# Altium PCB Iot_board_pcb.PcbDoc (part 1 of 2)
Units mm, origin at the board's own origin, x right, y up, seen from the top; angles counter-clockwise.
Board outline 52.22 x 32.36 mm, 2 copper layers (Top Layer, Bottom Layer); 44 components, 33 nets, 185 pads, 33 vias.
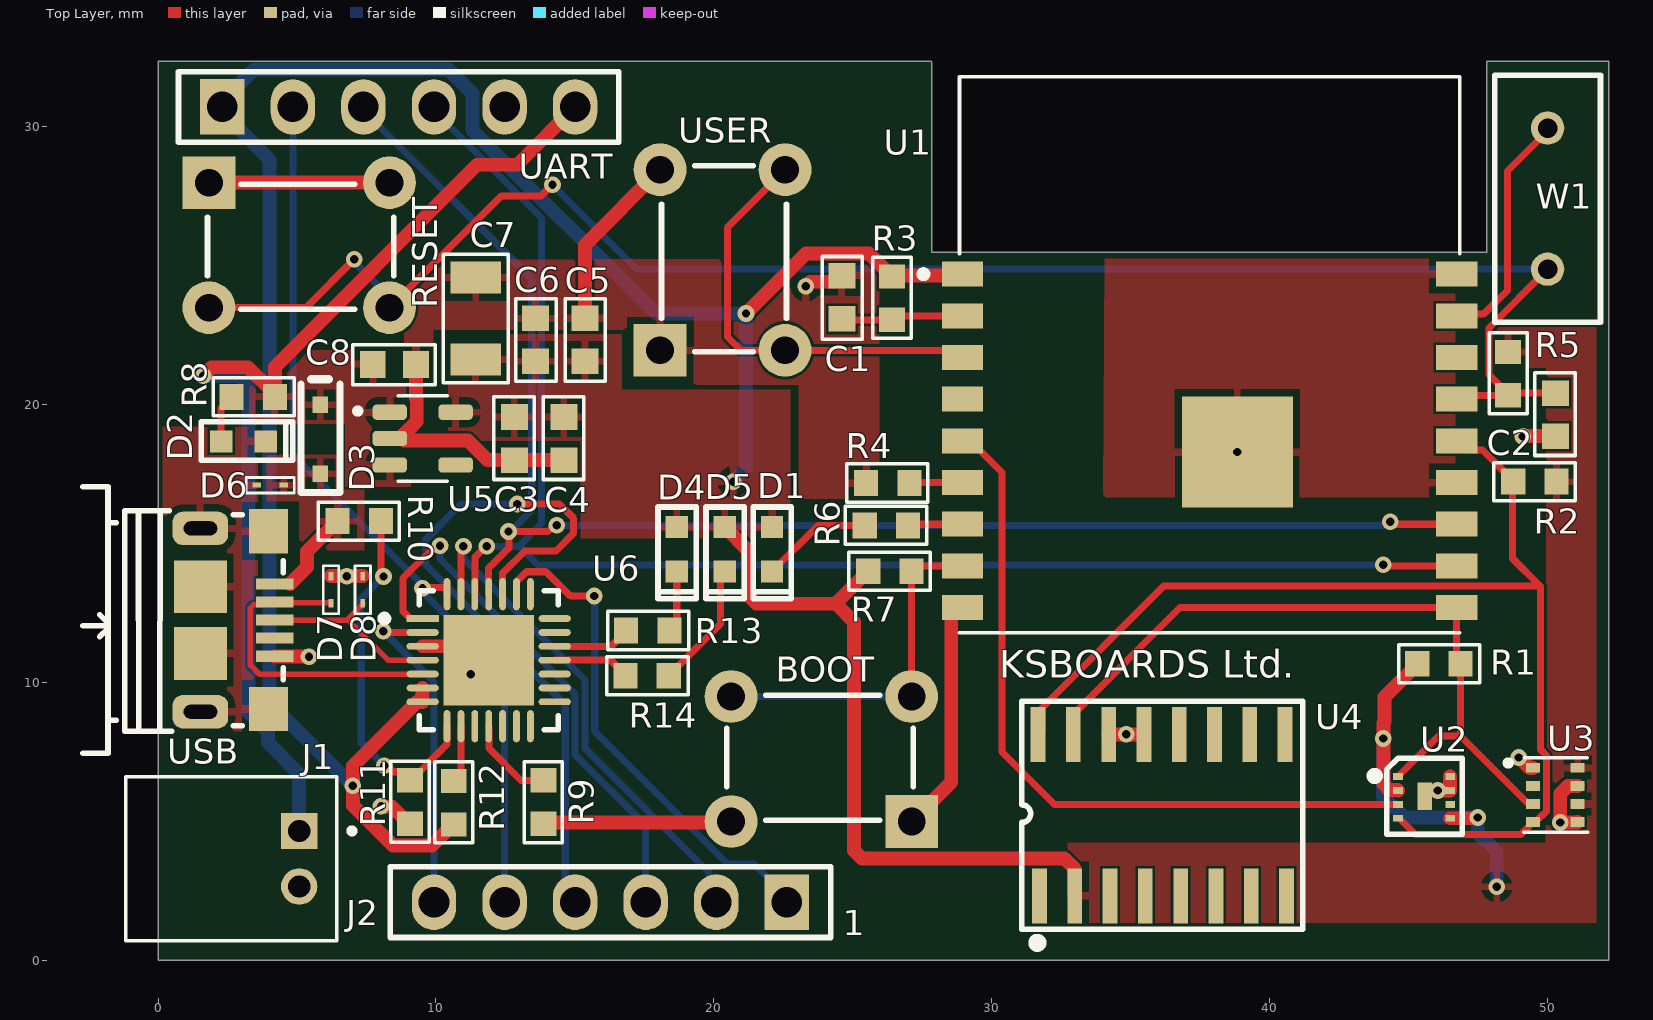
[diagram p0: Top Layer view]
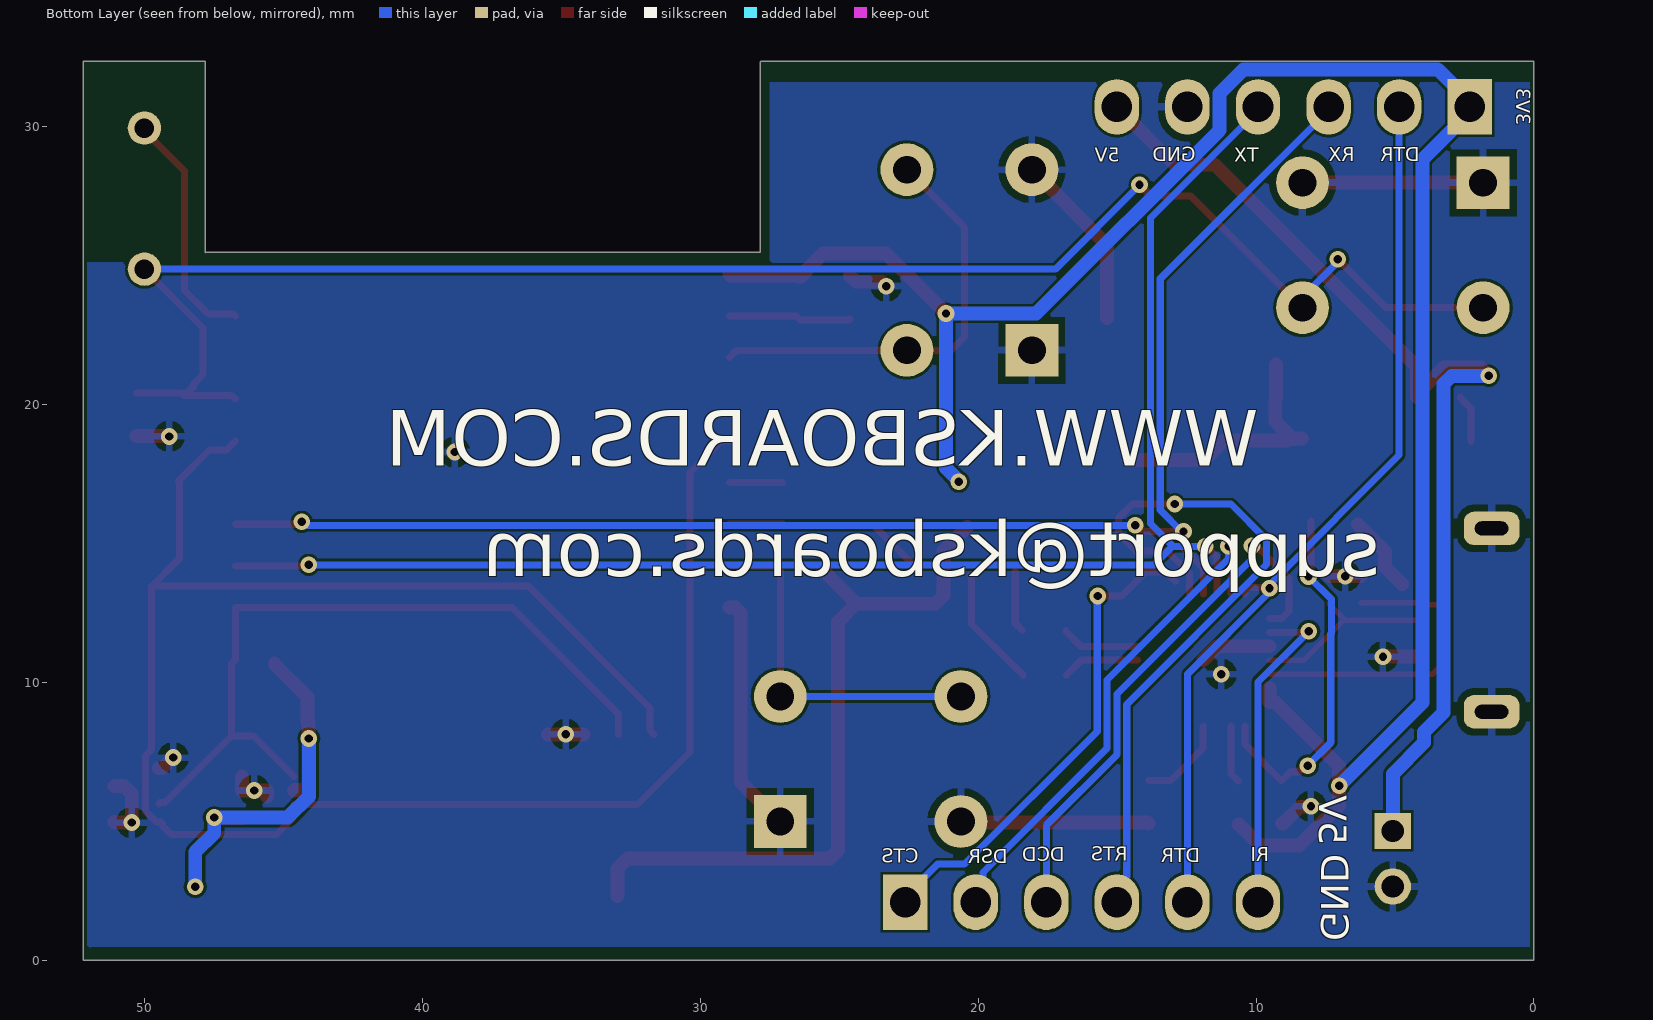
[diagram p1: Bottom Layer view, seen from below]
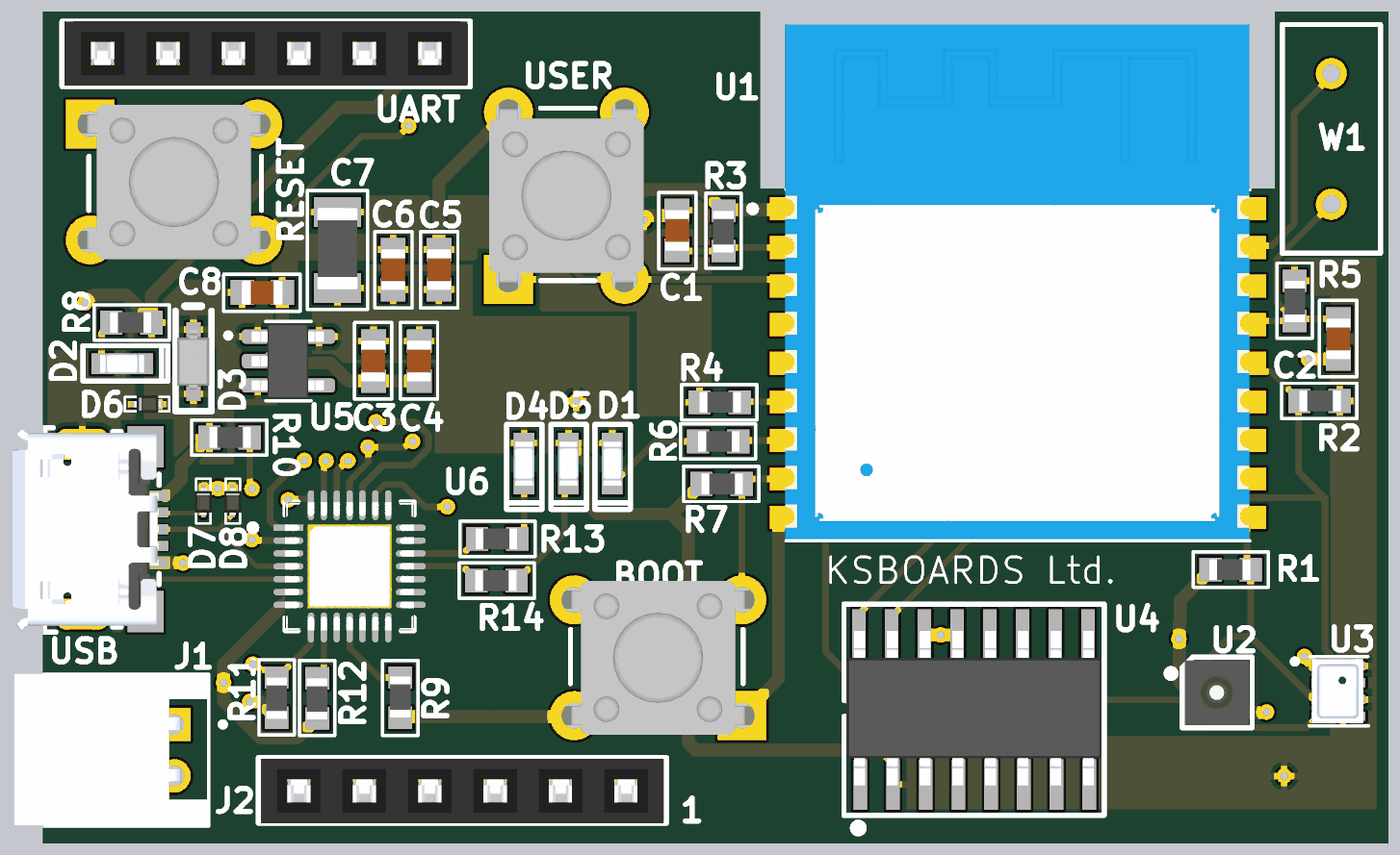
[diagram p2: 3D render of the assembled board from above, using the file's embedded part models]

## Layer stack, top to bottom
Top Solder: solder mask 0.0102, Solder Resist, Dk 3.5
Top Layer: signal copper 0.0356
Dielectric 1: dielectric 0.32, FR-4, Dk 4.8
Bottom Layer: signal copper 0.0356
Bottom Solder: solder mask 0.0102, Solder Resist, Dk 3.5

## Board outline
27.813,32.36 27.838,32.334 27.838,25.476 47.803,25.476 47.828,25.451 47.828,32.36 52.222,32.36 52.222,0 0,0 0,32.36

## Design rules (kind name [scope] priority, off if disabled: settings)
Clearance [All] p1: gap=0.1 ignorepadtopadclearanceinfootprint=FALSE
DiffPairsRouting [All] p1: maxlimit=0.254 minlimit=0.2 mostfreqgap=0.2 toplayer_minwidth=0.2 toplayer_maxwidth=0.2 toplayer_prefwidth=0.2 bottomlayer_minwidth=0.2 bottomlayer_maxwidth=0.2 bottomlayer_prefwidth=0.2 maxuncoupledlength=12.7
MinimumSolderMaskSliver [All] p1: minsoldermaskwidth=0.01
PolygonConnect [All] p1: connectstyle=Relief reliefconductorwidth=0.254 reliefentries=4 polygonreliefangle="90 Angle" airgapwidth=0.254
RoutingVias [All] p1: holewidth=0.711 width=1.27 viastyle="Through Hole" minholewidth=0.711 minwidth=1.27 maxholewidth=0.711 maxwidth=1.27
SilkToSilkClearance [All] p1: silktosilkclearance=0.005
SilkToSolderMaskClearance [IsPad] p1: minsilkscreentomaskgap=0.005 clearancetoexposedcopper=TRUE
SolderMaskExpansion [All] p1: expansion=0.102 istentingtop=FALSE
Width Width_Power [InNetClass('PowerNets')] p1: maxlimit=0.5 minlimit=0.5 preferedwidth=0.5
Width Width_1 [All] p2: maxlimit=0.254 minlimit=0.254 preferedwidth=0.254
26 further rules are at their usual default settings.

## Classes and differential pairs
net class PowerNets: 3V3 5V_ext GND Vbus
differential pair usb: +CON_USB_P -CON_USB_N

## Components (designator, comment, footprint, x,y, rotation, side; value= is the part's Value field where it differs from the comment)
BOOT "1825910-6" 1825910-6 23.876,7.239 r270 top (schematic designator SW1)
C1 "0.1uF" C0603 24.613,23.851 r270 top
C2 "0.1uF" C0603 50.292,19.634 r90 top
C3 "4.7uF" C0603 12.827,18.771 r90 top
C4 "0.1uF" C0603 14.605,18.771 r90 top
C5 "1uF" C0603 15.367,22.327 r270 top
C6 "10uF" C0603 13.589,22.327 r270 top
C7 "100uF" C1206 11.43,23.089 r270 top
C8 "1uF" C0603 8.509,21.438 r180 top
D1 "Blue" LED_0603 22.098,14.783 r90 top
D2 "Blue" LED_0603 3.073,18.669 r180 top
D3 "BAT760-7" SOD323 5.842,18.771 r270 top
D4 "Red" LED_0603 18.669,14.783 r90 top
D5 "GREEN" LED_0603 20.396,14.783 r90 top
D6 "CPDQ5V0-HF" SOD-923F 4.039,17.094 r180 top
D7 "CPDQ5V0-HF" SOD-923F 6.223,13.33 r90 top
D8 "CPDQ5V0-HF" SOD-923F 7.366,13.33 r90 top
J1 "JST 2 pin connector" JST_2PINS 5.08,3.648 r270 top
J2 "UART CONN PINS" HDR_FEMALE_1x6_2.54mm 22.631,2.083 r270 top
R1 "10k" R0603 46.101,10.668 r0 top
R2 "10k" R0603 49.555,17.221 r180 top
R3 "10k" R0603 26.416,23.825 r90 top
R4 "10k" R0603 26.264,17.17 r180 top
R5 "10k" R0603 48.59,21.107 r90 top
R6 "1k" R0603 26.213,15.646 r180 top
R7 "1k" R0603 26.34,13.995 r180 top
R8 "2k" R0603 3.429,20.269 r0 top
R9 "10k" R0603 13.868,5.69 r270 top
R10 "22k" R0603 7.239,15.799 r180 top
R11 "47.5k" R0603 9.068,5.69 r90 top
R12 "2k" R0603 10.643,5.664 r90 top
R13 "330R" R0603 17.628,11.862 r0 top
R14 "330R" R0603 17.602,10.236 r0 top
RESET "1825910-6" 1825910-6 5.08,25.73 r90 top (schematic designator SW3)
U1 "ESP-WROOM-02D (4MB)" MODULE_ESP-WROOM-02 37.846,19.787 r0 top
U2 "SHT30-DIS-B2.5KS" QFN8 44.628,6.604 r0 top
U3 "BMP280" LGA8 50.317,5.944 r0 top
U4 "DS3231SN#" SOP16 36.144,5.218 r90 top
U5 "ADP160AUJZ-3.3-R7" SOT95 9.525,18.771 r0 top
U6 "CP2102N-A01-GQFN28" FP-CP2102N-A01-GQFN28-IPC_A 11.901,10.794 r0 top
UART "UART CONN PINS" HDR_FEMALE_1x6_2.54mm 2.311,30.709 r90 top (schematic designator J3)
USB "USB-CON" 10118193 4.199,13.537 r270 top (schematic designator J4)
USER "1825910-6" 1825910-6 20.32,25.197 r180 top (schematic designator SW2)
W1 "Jumper" RAD-0.2 50.013,27.407 r270 top

## Footprints (in the part's own frame and the unit in brackets; to place one, negate y for a bottom-side part, rotate by r counter-clockwise, add the part's x,y. Pads: shape width x height; smd on the part's side, far side on the other; paste and mask are expansions set on the pad)
1825910-6 [mm]
  rect 1.9x1.9 hole 1: 1(2.25,3.25)
  round 1.9 hole 1: 2(2.25,-3.25) 3(-2.25,3.25) 4(-2.25,-3.25)
  silkscreen extent -2.3,-3.4 2.2,3.3, body extent -3,-3.9 2.99,3.9, height 5.01
10118193 [mm]
  rect 0.4x1.35 smd mask+0.05: 1(0,0) 2(0.65,0) 3(1.3,0) 4(1.95,0) 5(2.6,0)
  rect 1.6x1.4 smd: 6(-1.9,-0.225) 7(4.5,-0.225)
  rrect60% 1.2x2 hole 0.5 slot 1.2 at 90 deg: 8(-2,-2.675) 9(4.6,-2.675)
  rect 1.9x1.9 smd: 10(0.1,-2.675) 11(2.5,-2.675)
  silkscreen extent -3.5,-6.9 6.1,0.31, body extent -2.63,-5.41 5.23,0.3, height 2.86
C0603 [mm]
  rect 0.92x0.97 smd: 1(-0.775,0) 2(0.775,0)
  silkscreen extent -1.47,-0.71 1.5,0.74, body extent -0.8,-0.47 0.8,0.48, height 0.79
C1206 [mm]
  rect 1.16x1.82 smd: 1(-1.475,0) 2(1.475,0)
  silkscreen extent -2.31,-1.17 2.31,1.17, body extent -1.65,-0.8 1.55,0.8, height 0.85
FP-CP2102N-A01-GQFN28-IPC_A [mm]
  rect 1.16x0.242 smd paste+0 mask+0: 1(-2.376,1.5)
  rrect100% 1.16x0.242 smd paste+0 mask+0: 2(-2.376,1) 3(-2.376,0.5) 4(-2.376,0) 5(-2.376,-0.5) 6(-2.376,-1) 7(-2.376,-1.5) 15(2.376,-1.5) 16(2.376,-1) 17(2.376,-0.5) 18(2.376,0) 19(2.376,0.5) 20(2.376,1) 21(2.376,1.5)
  rrect100% 0.242x1.16 smd paste+0 mask+0: 8(-1.5,-2.376) 9(-1,-2.376) 10(-0.5,-2.376) 11(0,-2.376) 12(0.5,-2.376) 13(1,-2.376) 14(1.5,-2.376) 22(1.5,2.376) 23(1,2.376) 24(0.5,2.376) 25(0,2.376) 26(-0.5,2.376) 27(-1,2.376) 28(-1.5,2.376)
  rect 3.25x3.25 smd paste-1000 mask+0: 29(0,0)
  silkscreen extent -3.88,-2.5 2.5,2.5, body extent -3.46,-3.46 3.46,3.46, height 0.25
HDR_FEMALE_1x6_2.54mm [mm]
  rect 2x1.6 hole 1.1: 1(0,0)
  oval 2x1.6 hole 1.1: 2(0,-2.54) 3(0,-5.08) 4(0,-7.62) 5(0,-10.16) 6(0,-12.7)
  silkscreen extent -1.27,-14.27 1.27,1.57, body extent -1.23,-14.17 1.27,1.47, height 8.31
JST_2PINS [mm]
  rect 1.308x1.308 hole 0.8: 1(-1,0)
  round 1.308 hole 0.8: 2(1,0)
  silkscreen extent -2.95,-6.25 2.95,2, body extent -2.98,-6.19 2.92,1.41, height 4.8
LED_0603 [mm]
  rect 0.8x0.8 smd: 1(-0.8,0) 2(0.8,0)
  silkscreen extent -1.78,-0.7 1.53,0.67, body extent -0.85,-0.4 0.85,0.4, height 0.66
LGA8 [mm]
  rect 0.5x0.35 smd: 1(-0.825,0.975) 2(-0.825,0.325) 3(-0.825,-0.325) 4(-0.825,-0.975) 5(0.775,-0.975) 6(0.775,-0.325) 7(0.775,0.325) 8(0.775,0.975)
  silkscreen extent -1.82,-1.35 1.14,1.35, body extent -1.05,-1.26 0.95,1.24, height 1
MODULE_ESP-WROOM-02 [mm]
  rect 1.485x0.9 smd paste-2: 1(-8.892,4.9) 2(-8.892,3.4) 3(-8.892,1.9) 4(-8.892,0.4) 5(-8.892,-1.1) 6(-8.892,-2.6) 7(-8.892,-4.1) 8(-8.892,-5.6) 9(-8.892,-7.1) 10(8.892,-7.1) 11(8.892,-5.6) 12(8.892,-4.1) 13(8.892,-2.6) 14(8.892,-1.1) 15(8.892,0.4) 16(8.892,1.9) 17(8.892,3.4) 18(8.892,4.9)
  rect 4x4 smd paste-3: 19(1,-1.5)
  silkscreen extent -10.35,-8 9,12, body extent -9.03,-7.94 8.97,12.06, height 3.3
QFN8 [mm]
  rect 0.35x0.25 smd: 1(0,0) 2(0,-0.5) 3(0,-1) 4(0,-1.5) 5(1.879,-1.5) 6(1.879,-1) 7(1.879,-0.5) 8(1.879,0)
  rect 0.524x1 smd: 9(0.965,-0.711)
  silkscreen extent -0.87,-2.08 2.31,0.66, body extent -0.31,-1.97 2.19,0.53, height 0.9
R0603 [mm]
  rect 0.87x0.93 smd: 1(-0.78,0) 2(0.78,0)
  silkscreen extent -1.45,-0.69 1.47,0.69, body extent -0.83,-0.4 0.77,0.4, height 0.55
RAD-0.2 [mm] "Radial Cap, Thru-Hole; 2 Leads; 0.2 in Pin Spacing"
  round 1.2 hole 0.7: 1(-2.54,0) 2(2.54,0)
  silkscreen extent -4.44,-1.91 4.44,1.91
SOD323 [mil]
  rect 23x22 smd: 1(-48,0) 2(50,0)
  silkscreen extent -84,-28 77,28, body extent -48,-25 50,24, height 35
SOD-923F [mm]
  rect 0.3x0.175 smd: 1(-0.487,0) 2(0.487,0)
  silkscreen extent -0.86,-0.28 0.86,0.28, body extent -0.55,-0.33 0.5,0.33, height 0.82
SOP16 [mm]
  rect 1.98x0.53 smd: 1(-2.907,4.42) 2(-2.907,3.15) 3(-2.907,1.88) 4(-2.907,0.61) 5(-2.907,-0.66) 6(-2.907,-1.93) 7(-2.907,-3.2) 8(-2.907,-4.47) 9(2.907,-4.42) 10(2.907,-3.15) 11(2.907,-1.88) 12(2.907,-0.61) 13(2.907,0.66) 14(2.907,1.93) 15(2.907,3.2) 16(2.907,4.47)
  silkscreen extent -4.67,-5.05 4.1,5.05, body extent -2.94,-4.95 3.06,4.95, height 1.75
SOT95 [mm]
  rrect50% 1.24x0.55 smd: 1(-1.185,0.95) 2(-1.185,0) 3(-1.185,-0.95) 4(1.185,-0.95) 5(1.185,0.95)
  silkscreen extent -2.44,-1.54 0.88,1.54, body extent -1.42,-1.45 1.38,1.45, height 0.95

## Part data
BOOT RESET USER: "SWITCH TACTILE SPST-NO 0.05A 24V", Contact Current Rating=50mA, Contact Resistance=100mR, Manufacturer="TE Connectivity Alcoswitch", Max Operating Temperature=85°C, Max Voltage Rating (DC)=24V, Min Operating Temperature=-35°C, Operating Force=160gf, Package Quantity=750, Supplier Part Number 1=450-1650-ND, Actuator Length=0.055inch, Actuator Material=PBT, Actuator Type=Standard, Category="Pushbutton Switches", ComponentLink1Description=https://datasheet.ciiva.com/30199/1825910-6rqpn1825910-6-30199520.pdf?src-supplier=Onlinecomponents.com, ComponentLink1URL=https://datasheet.ciiva.com/30199/1825910-6rqpn1825910-6-30199520.pdf?src-supplier=Onlinecomponents.com, ComponentLink2Description=https://datasheet.ciiva.com/15184/getdatasheetpartid-395915-15184509.pdf?src-supplier=Verical, ComponentLink2URL=https://datasheet.ciiva.com/15184/getdatasheetpartid-395915-15184509.pdf?src-supplier=Verical, Contact Material="Copper Alloy", Contact Plating=Silver, Electrical Life=100000Cycles, ELV=Compliant, Illumination Type=Non-Illuminated,Illuminated, Lead Free="Lead Free", Length=5.99mm, Manufacturer Part Number=1825910-6, Max Current Rating=50mA, Mechanical Life=100000Cycles, Mount="Through Hole", Orientation=Straight, Packaging="Loose Piece", Pricing 1="1=0,10000, 10=0,10100, 25=0,09560, 100=0,08700, 250=0,08180, 500=0,07484, 1000=0,06265, 5000=0,05743, 10000=0,05395 (USD)", REACH SVHC=Unknown, RoHS=Yes, Stock 1=151652, Supplier 1=Digi-Key, Switch Function=Off-Mom, Switch Travel=0.25mm, Termination="PC Pins", Throw Configuration=SPST, Type=Switch
C1 C2 C4: library part C0603C104K5RACTU, "KEMET - C0603C104K5RACTU - SMD Multilayer Ceramic Capacitor, 0.1 µF, 50 V, 0603 [1608 Metric], ± 10%, X7R, C Series KEMET", Capacitance=100nF, Case Code (Imperial)=0603, Case Code (Metric)=1608, Dielectric=X7R, Dielectric Material=Ceramic, Manufacturer=KEMET, Max Operating Temperature=125°C, Min Operating Temperature=-55°C, Package Quantity=1, Supplier Part Number 1=399-5089-1-ND, Tolerance=10%, Voltage=50V, Case/Package=0603, Category="Ceramic Capacitors", Contact Plating=Tin,Matte, Depth=0.8mm, Dissipation Factor=2.5%, Height=0.8mm, Lead Pitch=0.7mm, Length=0.063inch, Manufacturer Part Number=C0603C104K5RACTU, Mount="Surface Mount", Number of Pins=2, Packaging="Tape and Reel", Pricing 1="1=0,12000, 10=0,08500, 50=0,04620, 100=0,03770, 500=0,02696, 1000=0,02118 (USD)", Radiation Hardening=No, REACH SVHC="No SVHC", RoHS=Yes, RoHS Compliant=Yes, Series="SMD Comm X7R", Stock 1=4652879, Supplier 1=Digi-Key, Termination=SMD/SMT, Thickness=0.034inch, Voltage Rating=50V, Voltage Rating (DC)=50V, Width=0.031inch
C3: library part C0603C475K9PACTU, "KEMET - C0603C475K9PACTU - SMD Multilayer Ceramic Capacitor, 4.7 µF, 6.3 V, 0603 [1608 Metric], ± 10%, X5R, C Series KEMET", Case Code (Imperial)=0603, Case Code (Metric)=1608, Dielectric=X5R, Dielectric Material=Ceramic, Manufacturer=KEMET, Max Operating Temperature=85°C, Min Operating Temperature=-55°C, Package Quantity=1, Supplier Part Number 1=399-3482-1-ND, Tolerance=10%, Voltage=6.3V, Capacitance=4.7uF, Case/Package=0603, Category="Ceramic Capacitors", ComponentLink1Description=https://datasheet.ciiva.com/145/docfinderpartnumber-c0603c475k9pactu-145072.pdf?src-supplier=Digi-Key, ComponentLink1URL=https://datasheet.ciiva.com/145/docfinderpartnumber-c0603c475k9pactu-145072.pdf?src-supplier=Digi-Key, ComponentLink2Description=https://datasheet.ciiva.com/7823/1732700-7823808.pdf?src-supplier=Element14, ComponentLink2URL=https://datasheet.ciiva.com/7823/1732700-7823808.pdf?src-supplier=Element14, ComponentLink3Description=https://datasheet.ciiva.com/28682/1789732-28682301.pdf?src-supplier=Element14, ComponentLink3URL=https://datasheet.ciiva.com/28682/1789732-28682301.pdf?src-supplier=Element14, ComponentLink4Description=https://datasheet.ciiva.com/7824/40889-7824047.pdf?src-supplier=Element14, ComponentLink4URL=https://datasheet.ciiva.com/7824/40889-7824047.pdf?src-supplier=Element14, Construction=Flat, Contact Plating=Tin,Matte, Depth=0.8mm, Dissipation Factor=5%, Height=0.8mm, Lead Free="Lead Free", Lead Pitch=0.7mm, Length=1.6mm, Manufacturer Part Number=C0603C475K9PACTU, Mount="Surface Mount,PCB", Number of Pins=2, Packaging="Tape and Reel", Pricing 1="1=0,16000, 10=0,11500, 50=0,06520, 100=0,05410, 500=0,03792, 1000=0,03139 (USD)", Radiation Hardening=No, REACH SVHC="No SVHC", RoHS=Yes, RoHS Compliant=Yes, Series=C, Stock 1=1092737, Supplier 1=Digi-Key, Termination=SMD/SMT, Thickness=0.035inch, Voltage Rating=6.3V, Voltage Rating (DC)=6.3V, Width=0.031inch
C5 C8: library part C0603C105K8PACTU, "Cap Ceramic 1uF 10V X5R 10% SMD 0603 85°C Paper T/R", Case Code (Imperial)=0603, Case Code (Metric)=1608, Dielectric=X5R, Dielectric Material=Ceramic, Manufacturer=KEMET, Max Operating Temperature=85°C, Min Operating Temperature=-55°C, Package Quantity=1, Supplier Part Number 1=399-3118-1-ND, Tolerance=10%, Voltage=10V, Capacitance=1uF, Case/Package=0603, Category="Ceramic Capacitors", ComponentLink1Description=https://datasheet.ciiva.com/11787/0900766b8116eb59-11787747.pdf?src-supplier=RSComponents, ComponentLink1URL=https://datasheet.ciiva.com/11787/0900766b8116eb59-11787747.pdf?src-supplier=RSComponents, ComponentLink2Description=https://datasheet.ciiva.com/6074/40889-6074647.pdf?src-supplier=Farnell, ComponentLink2URL=https://datasheet.ciiva.com/6074/40889-6074647.pdf?src-supplier=Farnell, ComponentLink3Description=https://datasheet.ciiva.com/28645/1831760-28645655.pdf?src-supplier=Element14, ComponentLink3URL=https://datasheet.ciiva.com/28645/1831760-28645655.pdf?src-supplier=Element14, ComponentLink4Description=https://datasheet.ciiva.com/26847/getdatasheetpartid-385480-26847548.pdf?src-supplier=Verical, ComponentLink4URL=https://datasheet.ciiva.com/26847/getdatasheetpartid-385480-26847548.pdf?src-supplier=Verical, ComponentLink5Description=https://datasheet.ciiva.com/7823/40889-7823998.pdf?src-supplier=Element14, ComponentLink5URL=https://datasheet.ciiva.com/7823/40889-7823998.pdf?src-supplier=Element14, ComponentLink6Description=https://datasheet.ciiva.com/7823/1929483-7823999.pdf?src-supplier=Element14, ComponentLink6URL=https://datasheet.ciiva.com/7823/1929483-7823999.pdf?src-supplier=Element14, Construction=Flat, Depth=0.8mm, Height=0.8mm, Lead Free="Lead Free", Length=1.6mm, Manufacturer Part Number=C0603C105K8PACTU, Mount="Surface Mount", Number of Pins=2, Packaging="Tape and Reel", Pricing 1="1=0,10000, 10=0,05300, 50=0,02900, 100=0,02370, 500=0,01694, 1000=0,01331 (USD)", Radiation Hardening=No, REACH SVHC="No SVHC", RoHS=Yes, RoHS Compliant=Yes, Series=C, Stock 1=515304, Supplier 1=Digi-Key, Termination=SMD/SMT, Thickness=0.035inch, Voltage Rating=10V, Voltage Rating (DC)=10V, Weight=7.1E-05oz, Width=0.031inch
C6: library part C0603C106M9PACTU, "KEMET - C0603C106M9PACTU - CAP, MLCC, X5R, 10UF, 6.3V, 0603", Case Code (Imperial)=0603, Case Code (Metric)=1608, Dielectric=X5R, Dielectric Material=Ceramic, Manufacturer=KEMET, Max Operating Temperature=85°C, Min Operating Temperature=-55°C, Package Quantity=4000, Supplier Part Number 1=399-5504-1-ND, Tolerance=20%, Voltage=6.3V, Capacitance=10uF, Case/Package=0603, Category="Ceramic Capacitors", ComponentLink1Description=http://components.arrow.com/part/dataview/42932973S8313645N7429?src-supplier=Arrow+Electronics, ComponentLink1URL=http://components.arrow.com/part/dataview/42932973S8313645N7429?src-supplier=Arrow+Electronics, ComponentLink2Description=http://www.farnell.com/datasheets/2739682.pdf?src-supplier=Farnell, ComponentLink2URL=http://www.farnell.com/datasheets/2739682.pdf?src-supplier=Farnell, ComponentLink3Description=http://uk.rs-online.com/webdocs/1515/0900766b8151511d.pdf?src-supplier=RSComponents, ComponentLink3URL=http://uk.rs-online.com/webdocs/1515/0900766b8151511d.pdf?src-supplier=RSComponents, ComponentLink4Description=http://www.farnell.com/datasheets/1918694.pdf?src-supplier=Farnell, ComponentLink4URL=http://www.farnell.com/datasheets/1918694.pdf?src-supplier=Farnell, ComponentLink5Description=http://components.arrow.com/part/dataview/0323_00011321?src-supplier=Arrow+Europe, ComponentLink5URL=http://components.arrow.com/part/dataview/0323_00011321?src-supplier=Arrow+Europe, ComponentLink6Description=https://www.verical.com/server-webapp/html/getDatasheet?partID=353664&src-supplier=Verical, ComponentLink6URL=https://www.verical.com/server-webapp/html/getDatasheet?partID=353664&src-supplier=Verical, ComponentLink7Description=http://www.farnell.com/datasheets/2739682.pdf?src-supplier=Element14, ComponentLink7URL=http://www.farnell.com/datasheets/2739682.pdf?src-supplier=Element14, ComponentLink8Description=https://api.kemet.com/component-edge/download/datasheet/C0603C106M9PACTU.pdf?src-supplier=Digi-Key, ComponentLink8URL=https://api.kemet.com/component-edge/download/datasheet/C0603C106M9PACTU.pdf?src-supplier=Digi-Key, ComponentLink9Description=http://www.farnell.com/datasheets/2315129.pdf?src-supplier=Verical, ComponentLink9URL=http://www.farnell.com/datasheets/2315129.pdf?src-supplier=Verical, ComponentLink10Description=http://www.farnell.com/datasheets/2315129.pdf?src-supplier=Avnet+Asia, ComponentLink10URL=http://www.farnell.com/datasheets/2315129.pdf?src-supplier=Avnet+Asia, ComponentLink11Description=http://www.kemet.com/kemet/web/homepage/kechome.nsf/weben/ADB5E2666EC6BA90CA2570A50016092E/$file/KEM_C1005_Y5V_SMD.pdf?src-supplier=Avnet, ComponentLink11URL=http://www.kemet.com/kemet/web/homepage/kechome.nsf/weben/ADB5E2666EC6BA90CA2570A50016092E/$file/KEM_C1005_Y5V_SMD.pdf?src-supplier=Avnet, ComponentLink12Description=http://www.farnell.com/datasheets/2315129.pdf?src-supplier=RSComponents, ComponentLink12URL=http://www.farnell.com/datasheets/2315129.pdf?src-supplier=RSComponents, ComponentLink13Description=http://www.farnell.com/datasheets/2739682.pdf?src-supplier=Newark, ComponentLink13URL=http://www.farnell.com/datasheets/2739682.pdf?src-supplier=Newark, ComponentLink14Description=http://www.farnell.com/datasheets/2315129.pdf?src-supplier=Allied+Electronics, ComponentLink14URL=http://www.farnell.com/datasheets/2315129.pdf?src-supplier=Allied+Electronics, ComponentLink15Description=http://www.farnell.com/datasheets/2315129.pdf?src-supplier=Mouser, ComponentLink15URL=http://www.farnell.com/datasheets/2315129.pdf?src-supplier=Mouser, ComponentLink16Description=http://capacitoredge.kemet.com/capedge2/DataSheet?pn=C0603C106M9PAC7867&src-supplier=Avnet, ComponentLink16URL=http://capacitoredge.kemet.com/capedge2/DataSheet?pn=C0603C106M9PAC7867&src-supplier=Avnet, ComponentLink17Description=http://www.farnell.com/datasheets/2315129.pdf?src-supplier=Distrelec, ComponentLink17URL=http://www.farnell.com/datasheets/2315129.pdf?src-supplier=Distrelec, ComponentLink18Description=http://www.kemet.com/kemet/web/homepage/kechome.nsf/file/Commercial%20Ceramic%20Chips%20X5R%20Dielectric/$file/KEM_C1006_X5R_SMD.pdf?src-supplier=Element14, ComponentLink18URL=http://www.kemet.com/kemet/web/homepage/kechome.nsf/file/Commercial%20Ceramic%20Chips%20X5R%20Dielectric/$file/KEM_C1006_X5R_SMD.pdf?src-supplier=Element14, ComponentLink19Description=http://www.farnell.com/datasheets/2315129.pdf?src-supplier=TTI, ComponentLink19URL=http://www.farnell.com/datasheets/2315129.pdf?src-supplier=TTI, ComponentLink20Description=http://www.farnell.com/datasheets/2315129.pdf?src-supplier=Quest, ComponentLink20URL=http://www.farnell.com/datasheets/2315129.pdf?src-supplier=Quest, ComponentLink21Description=http://www.farnell.com/datasheets/2315129.pdf?src-supplier=TME, ComponentLink21URL=http://www.farnell.com/datasheets/2315129.pdf?src-supplier=TME, Construction=Flat, Depth=0.8mm, Height=0.8mm, Length=1.6mm, Manufacturer Part Number=C0603C106M9PACTU, Mount="PCB,Surface Mount", Number of Pins=2, Packaging="Tape and Reel", Pricing 1="1=0,31000, 10=0,21100, 50=0,14040, 100=0,11930, 500=0,08422, 1000=0,07369 (USD)", Radiation Hardening=No, REACH SVHC="No SVHC", RoHS=Yes, RoHS Compliant=Yes, Series=C0603C, Stock 1=149663, Supplier 1=Digi-Key, Termination=SMD/SMT, Voltage Rating=6.3V, Voltage Rating (DC)=6.3V
C7: library part C1206C107M9PACTU, "KEMET - C1206C107M9PACTU - CAP, 100µF, 6.3V, 20%, X5R, 1206", Case Code (Imperial)=1206, Case Code (Metric)=3216, Dielectric=X5R, Dielectric Material=Ceramic, Manufacturer=KEMET, Max Operating Temperature=85°C, Min Operating Temperature=-55°C, Package Quantity=1, Supplier Part Number 1=399-5620-1-ND, Tolerance=2%, Voltage=6.3V, Capacitance=100uF, Case/Package=1206, Category="Ceramic Capacitors", ComponentLink1Description=https://datasheet.ciiva.com/6161/1732717-6161699.pdf?src-supplier=Farnell, ComponentLink1URL=https://datasheet.ciiva.com/6161/1732717-6161699.pdf?src-supplier=Farnell, ComponentLink2Description=https://datasheet.ciiva.com/7729/1732717-7729830.pdf?src-supplier=Element14, ComponentLink2URL=https://datasheet.ciiva.com/7729/1732717-7729830.pdf?src-supplier=Element14, ComponentLink3Description=https://datasheet.ciiva.com/7729/1732717-7729831.pdf?src-supplier=Element14, ComponentLink3URL=https://datasheet.ciiva.com/7729/1732717-7729831.pdf?src-supplier=Element14, ComponentLink4Description=https://datasheet.ciiva.com/14589/70095383-14589256.pdf?src-supplier=Allied+Electronics, ComponentLink4URL=https://datasheet.ciiva.com/14589/70095383-14589256.pdf?src-supplier=Allied+Electronics, ComponentLink5Description=https://datasheet.ciiva.com/22749/1918694-22749624.pdf?src-supplier=Element14, ComponentLink5URL=https://datasheet.ciiva.com/22749/1918694-22749624.pdf?src-supplier=Element14, ComponentLink6Description=https://datasheet.ciiva.com/6114/40889-6114911.pdf?src-supplier=Farnell, ComponentLink6URL=https://datasheet.ciiva.com/6114/40889-6114911.pdf?src-supplier=Farnell, ComponentLink7Description=https://datasheet.ciiva.com/14592/70095383-14592223.pdf?src-supplier=Allied+Electronics, ComponentLink7URL=https://datasheet.ciiva.com/14592/70095383-14592223.pdf?src-supplier=Allied+Electronics, Construction=Flat, Depth=1.6mm, Dissipation Factor=5%, Height=1.6mm, Lead Free="Lead Free", Length=3.2mm, Manufacturer Part Number=C1206C107M9PACTU, Mount="Surface Mount,PCB", Number of Pins=2, Packaging="Tape and Reel", Pricing 1="1=1,10000, 10=0,86600, 50=0,75080, 100=0,64970, 500=0,49088, 1000=0,43312 (USD)", Radiation Hardening=No, REACH SVHC="No SVHC", RoHS=Yes, RoHS Compliant=Yes, Series=C, Stock 1=170758, Supplier 1=Digi-Key, Termination=SMD/SMT, Thickness=0.071inch, Voltage Rating=6.3V, Voltage Rating (DC)=6.3V, Width=0.063inch
D1 D2: library part LTST-C191TBKT, "LED BLUE CLEAR 0603 SMD", Case Code (Imperial)=0603, Case Code (Metric)=1608, Forward Current=20mA, Forward Voltage=3.8V, Lens Color=Colorless, Manufacturer="Vishay Lite-On", Max Operating Temperature=80°C, Max Power Dissipation=75mW, Min Operating Temperature=-20°C, Package Quantity=1, Power Dissipation=76mW, Reverse Voltage=5V, Supplier Part Number 1=160-1647-1-ND, Case/Package=0603, Category=LEDs, Color=Blue, ComponentLink1Description=https://datasheet.ciiva.com/2110/ltst-c191tbkt-2110256.pdf?src-supplier=Digi-Key, ComponentLink1URL=https://datasheet.ciiva.com/2110/ltst-c191tbkt-2110256.pdf?src-supplier=Digi-Key, ComponentLink2Description=https://datasheet.ciiva.com/12400/lite-on-ltst-c191tbkt-187207-12400737.pdf?src-supplier=Mouser, ComponentLink2URL=https://datasheet.ciiva.com/12400/lite-on-ltst-c191tbkt-187207-12400737.pdf?src-supplier=Mouser, ComponentLink3Description=https://datasheet.ciiva.com/19465/2047945-19465673.pdf?src-supplier=Jameco, ComponentLink3URL=https://datasheet.ciiva.com/19465/2047945-19465673.pdf?src-supplier=Jameco, ComponentLink4Description=https://datasheet.ciiva.com/11774/0900766b80dc02b4-11774413.pdf?src-supplier=RSComponents, ComponentLink4URL=https://datasheet.ciiva.com/11774/0900766b80dc02b4-11774413.pdf?src-supplier=RSComponents, ComponentLink5Description=https://datasheet.ciiva.com/15117/getdatasheetpartid-133342-15117680.pdf?src-supplier=Verical, ComponentLink5URL=https://datasheet.ciiva.com/15117/getdatasheetpartid-133342-15117680.pdf?src-supplier=Verical, ComponentLink6Description=https://datasheet.ciiva.com/16444/ltst-c191tbkt-16444756.pdf?src-supplier=Future+Electronics, ComponentLink6URL=https://datasheet.ciiva.com/16444/ltst-c191tbkt-16444756.pdf?src-supplier=Future+Electronics, ComponentLink7Description=https://datasheet.ciiva.com/26913/ltst-c191tbkt-26913718.pdf?src-supplier=IIIC, ComponentLink7URL=https://datasheet.ciiva.com/26913/ltst-c191tbkt-26913718.pdf?src-supplier=IIIC, ComponentLink8Description=https://datasheet.ciiva.com/2110/s-110-ltst-c191tbkt-2110257.pdf?src-supplier=Digi-Key, ComponentLink8URL=https://datasheet.ciiva.com/2110/s-110-ltst-c191tbkt-2110257.pdf?src-supplier=Digi-Key, Depth=1.6mm, Dominant Wavelength=475nm, Height=0.55mm, Illumination Color=Blue, Lead Free="Lead Free", Length=0.8mm, Lens Style=Diffused,Colorless,Clear,Rectangular, Lens Transparency=Clear, Luminous Intensity=180mcd, Manufacturer Part Number=LTST-C191TBKT, Mount="Surface Mount", Number of Elements=1, Number of LEDs=1, Number of Pins=2, Packaging="Tape and Reel", Pricing 1="1=0,33000, 10=0,26200, 100=0,11780, 500=0,10640, 1000=0,08740, 2000=0,07600 (USD)", Radiation Hardening=No, RoHS=Yes, RoHS Compliant=Yes, Stock 1=244513, Supplier 1=Digi-Key, Test Current=20mA, Viewing Angle=130°, Wavelength=468nm, Width=0.8mm
D3: "DIODE SCHOTTKY 30V 1A SOD323", Average Rectified Current=1A, Capacitance=25pF, Forward Voltage=550mV, Manufacturer=Diodes, Max Forward Surge Current (Ifsm)=5.5A, Max Operating Temperature=150°C, Max Power Dissipation=235mW, Max Repetitive Reverse Voltage (Vrrm)=30V, Max Reverse Current=50uA, Min Operating Temperature=-65°C, Package Quantity=3000, Supplier Part Number 1=BAT760DICT-ND, Category="Schottky Diodes", ComponentLink1Description=https://datasheet.ciiva.com/1178/ds30498-1178033.pdf?src-supplier=Element14, ComponentLink1URL=https://datasheet.ciiva.com/1178/ds30498-1178033.pdf?src-supplier=Element14, ComponentLink2Description=https://datasheet.ciiva.com/4715/ds30498-63155-4715521.pdf?src-supplier=Mouser, ComponentLink2URL=https://datasheet.ciiva.com/4715/ds30498-63155-4715521.pdf?src-supplier=Mouser, ComponentLink3Description=https://datasheet.ciiva.com/8301/ds30498-8301400.pdf?src-supplier=Avnet, ComponentLink3URL=https://datasheet.ciiva.com/8301/ds30498-8301400.pdf?src-supplier=Avnet, ComponentLink4Description=https://datasheet.ciiva.com/26788/bat760-7-26788796.pdf?src-supplier=IIIC, ComponentLink4URL=https://datasheet.ciiva.com/26788/bat760-7-26788796.pdf?src-supplier=IIIC, ComponentLink5Description=https://datasheet.ciiva.com/22695/1670989-22695799.pdf?src-supplier=Element14, ComponentLink5URL=https://datasheet.ciiva.com/22695/1670989-22695799.pdf?src-supplier=Element14, ComponentLink6Description=https://datasheet.ciiva.com/914/ds30498-914553.pdf?src-supplier=Digi-Key, ComponentLink6URL=https://datasheet.ciiva.com/914/ds30498-914553.pdf?src-supplier=Digi-Key, ComponentLink7Description=https://datasheet.ciiva.com/914/ds30498-914551.pdf?src-supplier=Digi-Key, ComponentLink7URL=https://datasheet.ciiva.com/914/ds30498-914551.pdf?src-supplier=Digi-Key, ComponentLink8Description=https://datasheet.ciiva.com/914/ds30498-914552.pdf?src-supplier=Digi-Key, ComponentLink8URL=https://datasheet.ciiva.com/914/ds30498-914552.pdf?src-supplier=Digi-Key, Contact Plating=Tin,Matte, Current Rating=1A, Element Configuration=Single, Forward Current=1A, Height=1mm, Lead Free="Lead Free", Length=1.8mm, Manufacturer Part Number=BAT760-7, Max Reverse Voltage (DC)=30V, Mount="Surface Mount", Number of Pins=2, Output Current=1A, Packaging="Tape and Reel", Peak Non-Repetitive Surge Current=5.5A, Polarity=Standard, Pricing 1="1=0,53000, 10=0,45000, 100=0,31200, 500=0,24360, 1000=0,19800 (USD)", Radiation Hardening=No, REACH SVHC="No SVHC", RoHS=Yes, Stock 1=214, Supplier 1=Digi-Key, Termination=SMD/SMT, Voltage Rating (DC)=30V, Weight=0.000173oz, Width=1.4mm
D4: library part HSMS-C190, "AVAGO TECHNOLOGIES - HSMS-C190 - LED, RED, 10MCD, 626NM", Case Code (Imperial)=0603, Case Code (Metric)=1608, Forward Current=20mA, Forward Voltage=2.1V, Lens Color=White, Manufacturer="Broadcom Avago", Max Operating Temperature=85°C, Min Operating Temperature=-40°C, Package Quantity=4000, Power Dissipation=52mW, Reverse Voltage=5V, Supplier Part Number 1=516-1422-1-ND, Case/Package=0603, Category=LEDs, Color=Red, ComponentLink1Description=https://datasheet.ciiva.com/4688/v02-0551en+ds+hsmx-cxxx+05mar2012-13514-4688272.pdf?src-supplier=Mouser, ComponentLink1URL=https://datasheet.ciiva.com/4688/v02-0551en+ds+hsmx-cxxx+05mar2012-13514-4688272.pdf?src-supplier=Mouser, ComponentLink2Description=https://datasheet.ciiva.com/11774/0900766b80ad69c9-11774200.pdf?src-supplier=RSComponents, ComponentLink2URL=https://datasheet.ciiva.com/11774/0900766b80ad69c9-11774200.pdf?src-supplier=RSComponents, ComponentLink3Description=https://datasheet.ciiva.com/15117/getdatasheetpartid-110718-15117496.pdf?src-supplier=Verical, ComponentLink3URL=https://datasheet.ciiva.com/15117/getdatasheetpartid-110718-15117496.pdf?src-supplier=Verical, ComponentLink4Description=https://datasheet.ciiva.com/29280/180663-da-01-en-chip-led-hsms-c190-rot-29280620.pdf?src-supplier=Conrad, ComponentLink4URL=https://datasheet.ciiva.com/29280/180663-da-01-en-chip-led-hsms-c190-rot-29280620.pdf?src-supplier=Conrad, ComponentLink5Description=https://datasheet.ciiva.com/14172/swseriehsmx-c150toc190-e-14172170.pdf?src-supplier=Distrelec, ComponentLink5URL=https://datasheet.ciiva.com/14172/swseriehsmx-c150toc190-e-14172170.pdf?src-supplier=Distrelec, Depth=0.8mm, Dominant Wavelength=626nm, Height=0.8mm, Illumination Color=Red, Lead Free="Lead Free", Length=1.6mm, Lens Style=Diffused,Colorless,Rectangular, Lens Transparency=Diffused, Luminous Intensity=10mcd, Manufacturer Part Number=HSMS-C190, Mount="Surface Mount", Number of Elements=1, Number of LEDs=1, Number of Pins=2, Packaging="Tape and Reel", Power Rating=52mW, Pricing 1="1=0,37000, 10=0,29300, 100=0,13140, 500=0,11872, 1000=0,09752, 2000=0,08480 (USD)", Radiation Hardening=No, REACH SVHC="No SVHC", RoHS=Yes, RoHS Compliant=Yes, Series=-, Stock 1=82017, Supplier 1=Digi-Key, Test Current=20mA, Viewing Angle=170°, Wavelength=626nm, Width=0.8mm
D5: library part LGL29K-G2J1-24-Z, "LED Uni-Color Green 572nm 2-Pin Chip 0603(1608Metric) T/R", Case Code (Imperial)=0603, Case Code (Metric)=1608, Color=Green, Forward Current=20mA, Forward Voltage=2.2V, Lens Color=White, Manufacturer="Osram Opto", Max Operating Temperature=100°C, Min Operating Temperature=-40°C, Package Quantity=5000, Reverse Voltage=12V, Supplier Part Number 1=475-2709-1-ND, Test Current=2mA, Case/Package=0603, Category=Uncategorized, ComponentLink1Description=https://datasheet.ciiva.com/4689/g-l29k-39844-4689584.pdf?src-supplier=Mouser, ComponentLink1URL=https://datasheet.ciiva.com/4689/g-l29k-39844-4689584.pdf?src-supplier=Mouser, ComponentLink2Description=https://datasheet.ciiva.com/15198/getdatasheetpartid-571127-15198411.pdf?src-supplier=Verical, ComponentLink2URL=https://datasheet.ciiva.com/15198/getdatasheetpartid-571127-15198411.pdf?src-supplier=Verical, ComponentLink3Description=https://datasheet.ciiva.com/2112/00077107-0-2112886.pdf?src-supplier=Digi-Key, ComponentLink3URL=https://datasheet.ciiva.com/2112/00077107-0-2112886.pdf?src-supplier=Digi-Key, ComponentLink4Description=https://datasheet.ciiva.com/2112/00077107-0-2112887.pdf?src-supplier=Digi-Key, ComponentLink4URL=https://datasheet.ciiva.com/2112/00077107-0-2112887.pdf?src-supplier=Digi-Key, ComponentLink5Description=https://datasheet.ciiva.com/2112/00077107-0-2112888.pdf?src-supplier=Digi-Key, ComponentLink5URL=https://datasheet.ciiva.com/2112/00077107-0-2112888.pdf?src-supplier=Digi-Key, Depth=0.8mm, Dominant Wavelength=570nm, Height=0.65mm, Illumination Color=Green, Length=1.3mm, Lens Size=0.8mm, Lens Style=Flat,Diffused,Colorless,Rectangular, Lens Transparency=Diffused, Luminous Flux=0.012lm, Luminous Intensity=5.6mcd, Manufacturer Part Number=LGL29K-G2J1-24-Z, Mount="Surface Mount", Number of Elements=1, Number of LEDs=1, Number of Pins=2, Packaging="Tape and Reel", Pricing 1="1=0,47000, 10=0,30800, 100=0,20530, 500=0,14198, 1000=0,11832, 2000=0,10649 (USD)", Radiation Hardening=No, RoHS=Yes, Stock 1=191201, Supplier 1=Digi-Key, Viewing Angle=160°, Width=0.8mm
D6 D7 D8: "TVS DIODE 5V 18.6V 0402/SOD923F", Breakdown Voltage=5.6V, Capacitance=15pF, Case/Package=0402, Clamping Voltage=7.3V, Manufacturer=Comchip, Max Operating Temperature=125°C, Min Operating Temperature=-40°C, Operating Supply Voltage=5V, Package Quantity=8000, Peak Pulse Current=9.4A, Peak Pulse Power=174W, Power Line Protection=No, Resistor Type=Zener, Supplier Part Number 1=641-1478-1-ND, Category="TVS Diodes", ComponentLink1Description=https://datasheet.ciiva.com/6577/cpdq5v0-hf20reva825126-6577872.pdf?src-supplier=Digi-Key, ComponentLink1URL=https://datasheet.ciiva.com/6577/cpdq5v0-hf20reva825126-6577872.pdf?src-supplier=Digi-Key, ComponentLink2Description=https://datasheet.ciiva.com/12545/cpdq5v0-hf20reva825126-218795-12545530.pdf?src-supplier=Mouser, ComponentLink2URL=https://datasheet.ciiva.com/12545/cpdq5v0-hf20reva825126-218795-12545530.pdf?src-supplier=Mouser, Diode Type=ZENER, Manufacturer Part Number=CPDQ5V0-HF, Min Breakdown Voltage=5.6V, Mount="Surface Mount", Number of Bidirectional Channels=1, Packaging="Tape and Reel", Pricing 1="1=0,28000, 10=0,19500, 100=0,09510, 500=0,07932, 1000=0,05511, 2000=0,04777 (USD)", Reverse Standoff Voltage=5V, RoHS=Yes, RoHS Compliant=Yes, Series=-, Supplier 1=Digi-Key
J1: library part S2B-PH-K-S(LF)(SN), "Conn Shrouded Header (4 Sides) HDR 2 POS 2mm Solder RA Thru-Hole Box", Color=Natural,White, Contact Resistance=20mR, Current Rating=2A, Flammability Rating="UL94 V-0", Housing Color=White, Insulation Resistance=1GR, Manufacturer=JST, Max Operating Temperature=85°C, Max Voltage Rating (AC)=100V, Min Operating Temperature=-25°C, Supplier Part Number 1=455-1719-ND, Category="Headers and Wire Housings", ComponentLink1Description=https://datasheet.ciiva.com/11747/0900766b8082f558-11747128.pdf?src-supplier=RSComponents, ComponentLink1URL=https://datasheet.ciiva.com/11747/0900766b8082f558-11747128.pdf?src-supplier=RSComponents, ComponentLink2Description=https://datasheet.ciiva.com/16484/s2b-ph-k-slfsn-16484405.pdf?src-supplier=Future+Electronics, ComponentLink2URL=https://datasheet.ciiva.com/16484/s2b-ph-k-slfsn-16484405.pdf?src-supplier=Future+Electronics, ComponentLink3Description=https://datasheet.ciiva.com/26894/getdatasheetpartid-641020-26894599.pdf?src-supplier=Verical, ComponentLink3URL=https://datasheet.ciiva.com/26894/getdatasheetpartid-641020-26894599.pdf?src-supplier=Verical, ComponentLink4Description=https://datasheet.ciiva.com/712/eph-712447.pdf?src-supplier=Digi-Key, ComponentLink4URL=https://datasheet.ciiva.com/712/eph-712447.pdf?src-supplier=Digi-Key, ComponentLink5Description=https://datasheet.ciiva.com/8052/80564-8052207.pdf?src-supplier=Element14, ComponentLink5URL=https://datasheet.ciiva.com/8052/80564-8052207.pdf?src-supplier=Element14, Connector Type="Male Pin", Contact Material=Tin,Brass,Bronze, Contact Mating Length=0.13inch, Contact Plating=Tin,Copper, Depth=7.6mm, Fastening Type=Detent, Gender=Male, Height=9.4mm, Housing Material=Polyamide, Lead Free="Lead Free", Lead Pitch=2mm, Length=5.9mm, Manufacturer Part Number=S2B-PH-K-S(LF)(SN), Max Current Rating=2A, Max Voltage Rating (DC)=100V, Mount="Through Hole", Number of Contacts=2, Number of Pins=2, Number of Poles=2, Number of Positions=2, Number of Rows=1, Orientation="Right Angle", Packaging=Bulk, Pitch=2mm, Pricing 1="1=0,170000, 25=0,119600, 50=0,102600, 250=0,085440, 750=0,076890, 1000=0,071770, 12000=0,054680, 24000=0,049560, 48000=0,046140 (USD)", REACH SVHC="No SVHC", RoHS=Yes, Stock 1=305259, Supplier 1=Digi-Key, Termination=Solder, Voltage Rating=100V, Voltage Rating (AC)=100V, Width=4.5mm, Working Voltage=100V
J2 UART: Color=Black, Contact Resistance=15mR, Current Rating=3A, Manufacturer="Amphenol FCI", Manufacturer Part Number=66951-010LF, Max Operating Temperature=125°C, Max Voltage Rating (AC)=1.25kV, Min Operating Temperature=-65°C, Package Quantity=23, Supplier Part Number 1=609-2240-ND, Category="Headers and Wire Housings", ComponentLink1Description=https://datasheet.ciiva.com/746/66951-746016.pdf?src-supplier=Digi-Key, ComponentLink1URL=https://datasheet.ciiva.com/746/66951-746016.pdf?src-supplier=Digi-Key, ComponentLink2Description=https://datasheet.ciiva.com/5155/66951-85357-5155344.pdf?src-supplier=Mouser, ComponentLink2URL=https://datasheet.ciiva.com/5155/66951-85357-5155344.pdf?src-supplier=Mouser, ComponentLink3Description=https://datasheet.ciiva.com/10137/66951-10137498.pdf?src-supplier=Avnet, ComponentLink3URL=https://datasheet.ciiva.com/10137/66951-10137498.pdf?src-supplier=Avnet, ComponentLink4Description=https://datasheet.ciiva.com/16727/66951-16727150.pdf?src-supplier=Avnet+Europe, ComponentLink4URL=https://datasheet.ciiva.com/16727/66951-16727150.pdf?src-supplier=Avnet+Europe, Connector Type=Receptacle,Socket, Contact Gender=Female, Contact Material=Copper,Brass, Contact Plating=Gold, Depth=5.08mm, Gender=Female, Housing Color=Black, Housing Material=Thermoplastic, Lead Free="Lead Free", Length=25.4mm, Mount="Through Hole", Number of Contacts=10, Number of Positions=10, Number of Rows=1, Orientation=Straight, Packaging=Rail/Tube, Pitch=2.54mm, Pricing 1="1=2,02000, 10=1,83400, 100=1,57210, 500=1,31006, 1000=1,12290, 5000=0,99564, 10000=0,97318 (USD)", RoHS=Yes, Stock 1=757, Supplier 1=Digi-Key, Termination=Solder, Voltage Rating=1.25kV, Width=5.08mm
R1 R2 R3 R4 R5 R9: library part CRCW060310K0FKEA, "VISHAY - CRCW060310K0FKEA - SMD Chip Resistor, 0603 [1608 Metric], 10 kohm, CRCW e3 Series, 75 V, Thick Film, 100 mW", Case Code (Imperial)=0603, Case Code (Metric)=1608, Manufacturer=Vishay, Max Operating Temperature=155°C, Max Power Dissipation=100mW, Min Operating Temperature=-55°C, Package Quantity=10, Resistance=10kR, Resistance Tolerance=1%, Resistor Type="Thick Film", Supplier Part Number 1=541-10.0KHCT-ND, Temperature Coefficient=100ppm/°C, Voltage Rating=75V, Case/Package=0603, Category="Chip SMD Resistors", ComponentLink1Description=https://datasheet.ciiva.com/11809/0900766b80d98afc-11809037.pdf?src-supplier=RSComponents, ComponentLink1URL=https://datasheet.ciiva.com/11809/0900766b80d98afc-11809037.pdf?src-supplier=RSComponents, ComponentLink2Description=https://datasheet.ciiva.com/16886/dcrcw-16886037.pdf?src-supplier=Avnet+Europe, ComponentLink2URL=https://datasheet.ciiva.com/16886/dcrcw-16886037.pdf?src-supplier=Avnet+Europe, ComponentLink3Description=https://datasheet.ciiva.com/26821/getdatasheetpartid-86831-26821109.pdf?src-supplier=Verical, ComponentLink3URL=https://datasheet.ciiva.com/26821/getdatasheetpartid-86831-26821109.pdf?src-supplier=Verical, ComponentLink4Description=https://datasheet.ciiva.com/16754/70201119-16754710.pdf?src-supplier=Allied+Electronics, ComponentLink4URL=https://datasheet.ciiva.com/16754/70201119-16754710.pdf?src-supplier=Allied+Electronics, ComponentLink5Description=https://datasheet.ciiva.com/16719/70201119-16719704.pdf?src-supplier=Allied+Electronics, ComponentLink5URL=https://datasheet.ciiva.com/16719/70201119-16719704.pdf?src-supplier=Allied+Electronics, ComponentLink6Description=https://datasheet.ciiva.com/2465/dcrcwe3-2465513.pdf?src-supplier=Digi-Key, ComponentLink6URL=https://datasheet.ciiva.com/2465/dcrcwe3-2465513.pdf?src-supplier=Digi-Key, ComponentLink7Description=https://datasheet.ciiva.com/5543/dcrcwe3-109170-5543001.pdf?src-supplier=Mouser, ComponentLink7URL=https://datasheet.ciiva.com/5543/dcrcwe3-109170-5543001.pdf?src-supplier=Mouser, ComponentLink8Description=https://datasheet.ciiva.com/2465/dcrcwe3-2465514.pdf?src-supplier=Digi-Key, ComponentLink8URL=https://datasheet.ciiva.com/2465/dcrcwe3-2465514.pdf?src-supplier=Digi-Key, ComponentLink9Description=https://datasheet.ciiva.com/46385/1697337-46385498.pdf?src-supplier=Element14, ComponentLink9URL=https://datasheet.ciiva.com/46385/1697337-46385498.pdf?src-supplier=Element14, ComponentLink10Description=https://datasheet.ciiva.com/2465/dcrcwe3-2465515.pdf?src-supplier=Digi-Key, ComponentLink10URL=https://datasheet.ciiva.com/2465/dcrcwe3-2465515.pdf?src-supplier=Digi-Key, ComponentLink11Description=https://datasheet.ciiva.com/3256/dcrcwe3-3256939.pdf?src-supplier=Avnet, ComponentLink11URL=https://datasheet.ciiva.com/3256/dcrcwe3-3256939.pdf?src-supplier=Avnet, ComponentLink12Description=https://datasheet.ciiva.com/3256/dcrcwe3-3256940.pdf?src-supplier=Avnet, ComponentLink12URL=https://datasheet.ciiva.com/3256/dcrcwe3-3256940.pdf?src-supplier=Avnet, ComponentLink13Description=https://datasheet.ciiva.com/16209/dcrcwe3-16209164.pdf?src-supplier=Future+Electronics, ComponentLink13URL=https://datasheet.ciiva.com/16209/dcrcwe3-16209164.pdf?src-supplier=Future+Electronics, ComponentLink14Description=https://datasheet.ciiva.com/26314/fld-crcw-e3-data-en-26314749.pdf?src-supplier=Distrelec, ComponentLink14URL=https://datasheet.ciiva.com/26314/fld-crcw-e3-data-en-26314749.pdf?src-supplier=Distrelec, Construction=Rectangular, Contact Plating=Tin,Lead, Depth=0.85mm, Features="Automotive AEC-Q200", Height=0.45mm, Lead Free="Lead Free", Length=1.55mm, Manufacturer Part Number=CRCW060310K0FKEA, Military Standard=Not, Number of Pins=2, Number of Terminations=2, Packaging="Tape and Reel", Power Rating=100mW, Pricing 1="1=0,10000, 10=0,03400, 100=0,01390, 1000=0,00624, 2500=0,00542 (USD)", Radiation Hardening=No, REACH SVHC=Unknown, RoHS=Yes, RoHS Compliant=Yes, Series=CRCW, Size Code=0603, Supplier 1=Digi-Key, Technology="THICK FILM", Termination=SMD/SMT, Tolerance=1%, Voltage Rating (DC)=75V, Weight=7.1E-05oz, Width=0.033inch
R6 R7: library part CRCW06031K00FKEA, "VISHAY - CRCW06031K00FKEA - SMD Chip Resistor, 0603 [1608 Metric], 1 kohm, CRCW e3 Series, 75 V, Thick Film, 100 mW", Case Code (Imperial)=0603, Case Code (Metric)=1608, Manufacturer="Vishay Dale", Max Operating Temperature=155°C, Max Power Dissipation=100mW, Min Operating Temperature=-55°C, Package Quantity=10, Resistance=1kR, Resistance Tolerance=1%, Resistor Type="Thick Film", Supplier Part Number 1=541-1.00KHCT-ND, Temperature Coefficient=100ppm/°C, Voltage Rating=75V, Case/Package=0603, Category="Chip SMD Resistors", ComponentLink1Description=https://datasheet.ciiva.com/11808/0900766b80d98afc-11808625.pdf?src-supplier=RSComponents, ComponentLink1URL=https://datasheet.ciiva.com/11808/0900766b80d98afc-11808625.pdf?src-supplier=RSComponents, ComponentLink2Description=https://datasheet.ciiva.com/2465/dcrcwe3-2465536.pdf?src-supplier=Digi-Key, ComponentLink2URL=https://datasheet.ciiva.com/2465/dcrcwe3-2465536.pdf?src-supplier=Digi-Key, ComponentLink3Description=https://datasheet.ciiva.com/8336/dcrcwe3-8336822.pdf?src-supplier=Avnet, ComponentLink3URL=https://datasheet.ciiva.com/8336/dcrcwe3-8336822.pdf?src-supplier=Avnet, ComponentLink4Description=https://datasheet.ciiva.com/16515/dcrcwe3-16515078.pdf?src-supplier=Avnet+Asia, ComponentLink4URL=https://datasheet.ciiva.com/16515/dcrcwe3-16515078.pdf?src-supplier=Avnet+Asia, ComponentLink5Description=https://datasheet.ciiva.com/46441/1720486-46441622.pdf?src-supplier=Element14, ComponentLink5URL=https://datasheet.ciiva.com/46441/1720486-46441622.pdf?src-supplier=Element14, ComponentLink6Description=https://datasheet.ciiva.com/26316/fld-crcw-e3-data-en-26316551.pdf?src-supplier=Distrelec, ComponentLink6URL=https://datasheet.ciiva.com/26316/fld-crcw-e3-data-en-26316551.pdf?src-supplier=Distrelec, ComponentLink7Description=https://datasheet.ciiva.com/46441/1720486-46441623.pdf?src-supplier=Element14, ComponentLink7URL=https://datasheet.ciiva.com/46441/1720486-46441623.pdf?src-supplier=Element14, ComponentLink8Description=https://datasheet.ciiva.com/46385/1697337-46385497.pdf?src-supplier=Element14, ComponentLink8URL=https://datasheet.ciiva.com/46385/1697337-46385497.pdf?src-supplier=Element14, ComponentLink9Description=https://datasheet.ciiva.com/3257/dcrcwe3-3257132.pdf?src-supplier=Avnet, ComponentLink9URL=https://datasheet.ciiva.com/3257/dcrcwe3-3257132.pdf?src-supplier=Avnet, ComponentLink10Description=https://datasheet.ciiva.com/16199/dcrcwe3-16199053.pdf?src-supplier=Future+Electronics, ComponentLink10URL=https://datasheet.ciiva.com/16199/dcrcwe3-16199053.pdf?src-supplier=Future+Electronics, ComponentLink11Description=https://datasheet.ciiva.com/2465/dcrcwe3-2465534.pdf?src-supplier=Digi-Key, ComponentLink11URL=https://datasheet.ciiva.com/2465/dcrcwe3-2465534.pdf?src-supplier=Digi-Key, ComponentLink12Description=https://datasheet.ciiva.com/16893/dcrcwe3-16893742.pdf?src-supplier=Avnet+Europe, ComponentLink12URL=https://datasheet.ciiva.com/16893/dcrcwe3-16893742.pdf?src-supplier=Avnet+Europe, ComponentLink13Description=https://datasheet.ciiva.com/2465/dcrcwe3-2465535.pdf?src-supplier=Digi-Key, ComponentLink13URL=https://datasheet.ciiva.com/2465/dcrcwe3-2465535.pdf?src-supplier=Digi-Key, Construction=Rectangular, Contact Plating=Tin, Depth=0.85mm, Features="Automotive AEC-Q200", Height=0.45mm, Lead Free="Lead Free", Length=1.55mm, Manufacturer Part Number=CRCW06031K00FKEA, Military Standard=Not, Mount="Surface Mount", Number of Pins=2, Number of Terminations=2, Packaging="Tape and Reel", Power Rating=100mW, Pricing 1="1=0,10000, 10=0,03400, 100=0,01390, 1000=0,00624, 2500=0,00542 (USD)", Radiation Hardening=No, REACH SVHC=Unknown, RoHS=Yes, RoHS Compliant=Yes, Series=CRCW, Size Code=0603, Stock 1=198661, Supplier 1=Digi-Key, Technology="THICK FILM", Termination=SMD/SMT, Tolerance=1%, Voltage Rating (DC)=75V, Weight=7.1E-05oz, Width=0.033inch